# Allegro board Mask_de10_nano.brd
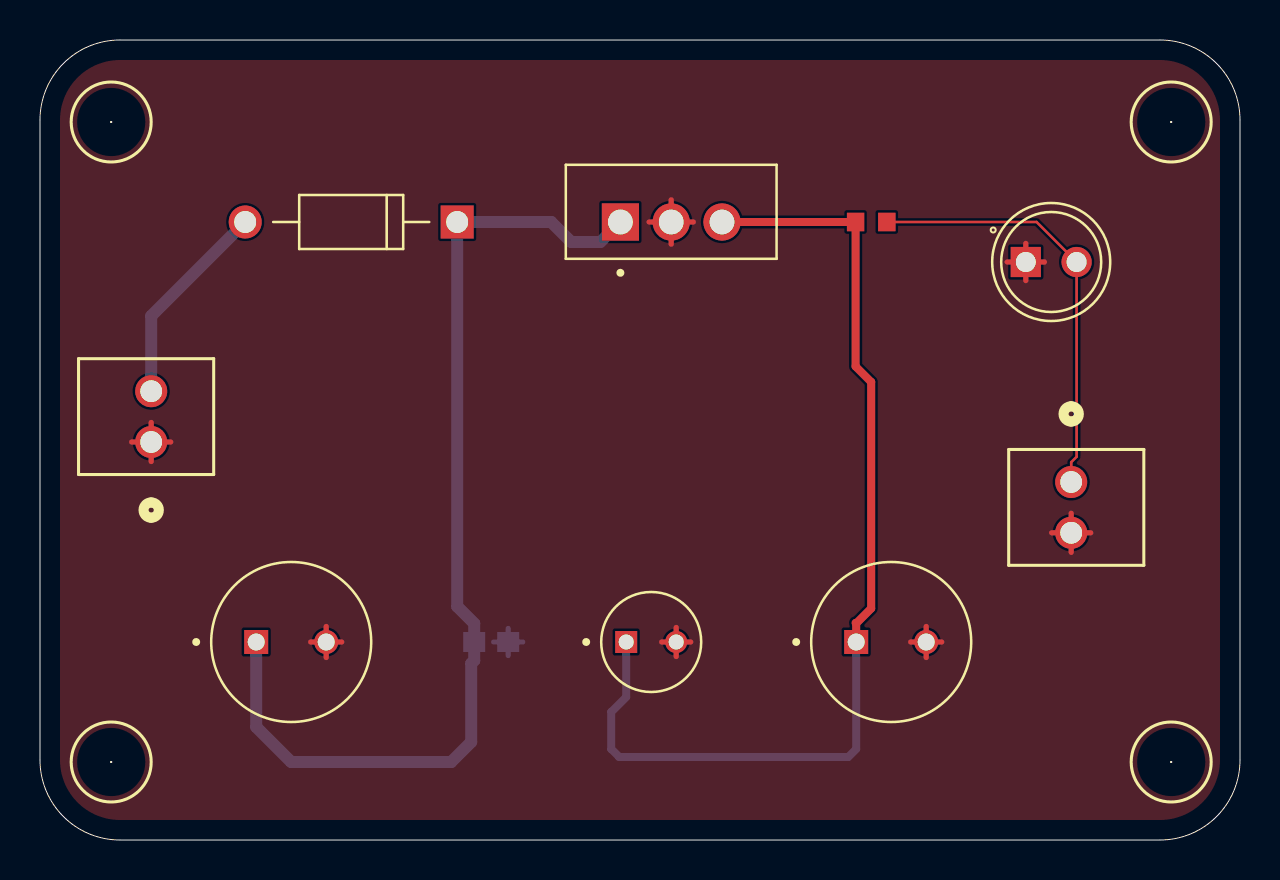
[diagram p0: board, top side]
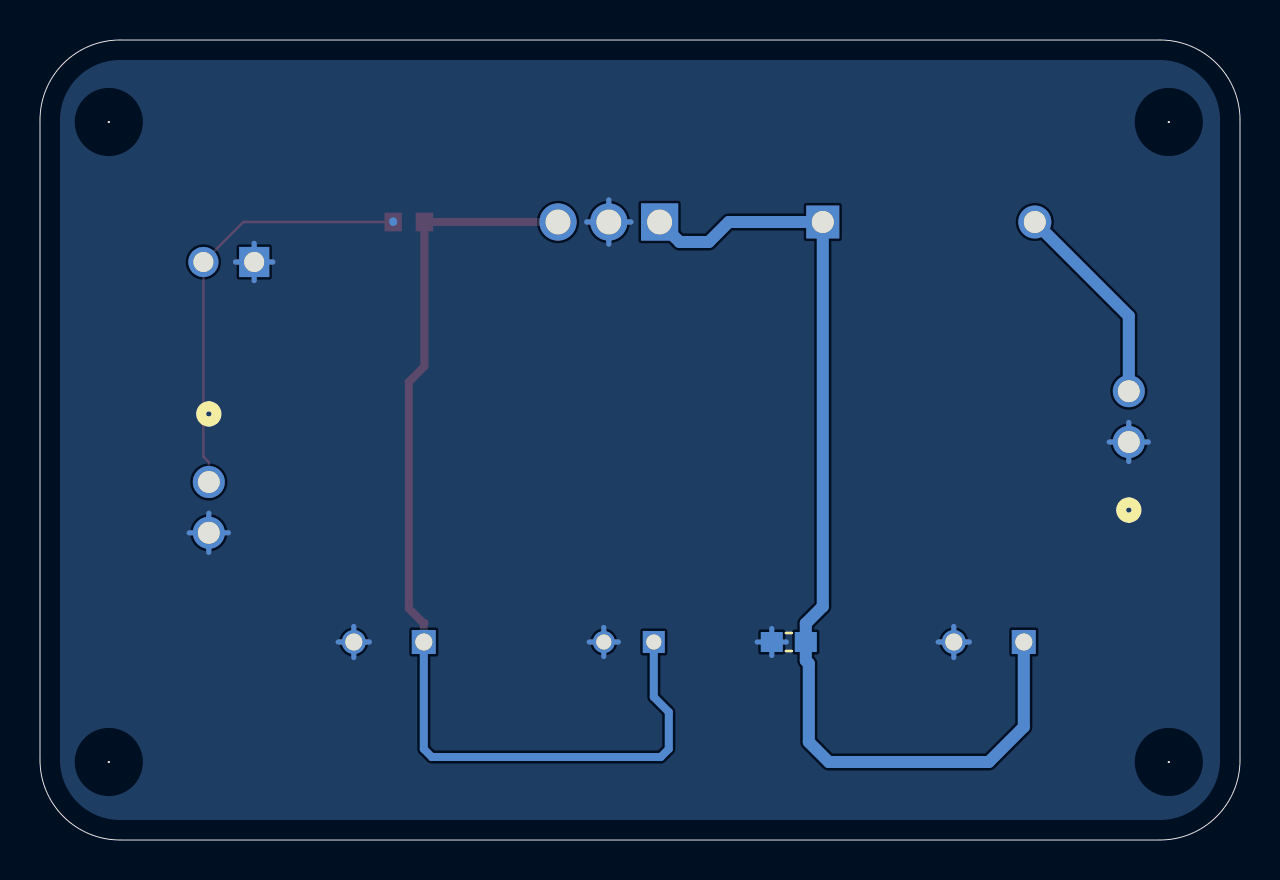
[diagram p1: board, bottom side, seen from below]

Outline 60 x 40 mm; copper layers: TOP, BOTTOM. Coordinates in mm from the lower left corner of the outline.
Outline path: 0,36 arc(1.17,38.83) 4,40 56,40 arc(58.83,38.83) 60,36 60,4 arc(58.83,1.17) 56,0 4,0 arc(1.17,1.17) 0,4 0,36

## Design rules (mm)
constraint set DEFAULT: min track width 0.127
nets with their own width: min track width 0.254; nets GND
nets with their own width: min track width 0.4; nets N00455
nets with their own width: min track width 0.6; nets IN12V VIND

## Placement (name value [footprint] x y rotation side)
C2  1uf  [CAPC1608X90]  22.56 9.9 180 bottom
C3  47uf  [CAPPRD250W50D500H1100]  30.56 9.9 0 top
C4  100uf  [CAPPRD350W60D800H1150]  42.56 9.9 0 top
C5  470 uf  [CAPPRD350W60D800H1150]  12.56 9.9 0 top
D1  1N4007  [DIOAD1060W80L520D270]  15.56 30.9 180 top
D2  led  [LED_WP7113SECJ3]  50.56 28.9 0 top
J1  in12v  [CONN_39773-0002_MOL]  5.56 19.9 90 top
J2  out12v  [CONN_39773-0002_MOL]  51.56 17.9 270 top
NOREF  -  [unnamed]  3.56 3.9 0 top
NOREF#2  -  [unnamed]  56.56 35.9 0 top
NOREF#3  -  [unnamed]  3.56 35.9 0 top
NOREF#4  -  [unnamed]  56.56 3.9 0 top
R1  1k  [RESC1608X55N]  41.56 30.9 0 top
VR2  LM7812CTNOPB  [TO254P1054X470X1955-3]  31.56 30.9 0 top

## Library data of the parts
C2 = TACL105K010XTA
C3 = EEUHD1E470
C4 C5 = EEUFR1V101B
D1 = 1N4007
D2 = WP7113SECJ3
J1 J2 = 397730002_1
R1 = CR0603AFX-1001EAS
VR2 = LM7812CTNOPB

## Footprints (pads in the part's own frame, mm; a bottom-side part is the same pattern mirrored in y, then rotated)
CAPC1608X90
  rect 1.1x1 smd: 1(-0.85,0) 2(0.85,0)
CAPPRD250W50D500H1100
  round 1.1 hole 0.75: N(1.25,0)
  rect 1.1x1.1 hole 0.75: P(-1.25,0)
CAPPRD350W60D800H1150
  round 1.2 hole 0.85: N(1.75,0)
  rect 1.2x1.2 hole 0.85: P(-1.75,0)
CONN_39773-0002_MOL
  round 1.6 hole 1.092: 1(0,0) 2(2.54,0)
DIOAD1060W80L520D270
  round 1.65 hole 1.1: A(5.3,0)
  rect 1.65x1.65 hole 1.1: C(-5.3,0)
LED_WP7113SECJ3
  round 1.508 hole 1: A(1.27,0)
  rect 1.508x1.508 hole 1: C(-1.27,0)
RESC1608X55N
  rect 0.87x0.93 smd: 1(-0.78,0) 2(0.78,0)
TO254P1054X470X1955-3
  rect 1.86x1.86 hole 1.24: 1(-2.54,0)
  round 1.86 hole 1.24: 2(0,0) 3(2.54,0)
unnamed
  round 0.1 hole 3 unplated: (0,0)

## Nets
GND: C2.1 C3.N C4.N C5.N D2.C J1.1 J2.2 VR2.2
VIND: C2.2 C5.P D1.C VR2.1
IN12V: D1.A J1.2
N00455: C3.P C4.P R1.1 VR2.3(OUTPUT)
N00468: D2.A J2.1 R1.2

## Routing (per net, layer and track width the routed paths; a pad name or vN(x,y) marks a point on that pad's centre or on a via; arc(x,y) is an arc through that point)
GND: length 53.1
  TOP w0.254: 14.31,9.12 C5.N ; C5.N 13.53,9.9 ; C5.N 14.31,10.68 ; C5.N 15.09,9.9 ; 48.36,28.9 D2.C ; D2.C 49.29,29.83 ; D2.C 50.22,28.9 ; D2.C 49.29,27.97 ; 4.58,19.9 J1.1 ; J1.1 5.56,18.92 ; J1.1 5.56,20.88 ; J1.1 6.54,19.9 ; 30.45,30.9 VR2.2 ; VR2.2 32.67,30.9 ; VR2.2 31.56,29.79 ; VR2.2 31.56,32.01 ; 43.53,9.9 C4.N ; C4.N 44.31,9.12 ; C4.N 45.09,9.9 ; C4.N 44.31,10.68 ; 50.58,15.36 J2.2 ; J2.2 52.54,15.36 ; J2.2 51.56,16.34 ; J2.2 51.56,14.38 ; C3.N 31.81,10.63 ; C3.N 32.54,9.9 ; C3.N 31.81,9.17 ; C3.N 31.08,9.9
  BOTTOM w0.254: C2.1 23.41,10.58 ; C2.1 23.41,9.22 ; C2.1 22.68,9.9 ; C2.1 24.14,9.9 ; C4.N 44.31,10.68 ; C4.N 44.31,9.12 ; C4.N 43.53,9.9 ; C4.N 45.09,9.9 ; 49.29,27.97 D2.C ; D2.C 48.36,28.9 ; D2.C 50.22,28.9 ; D2.C 49.29,29.83 ; J2.2 51.56,16.34 ; J2.2 52.54,15.36 ; J2.2 51.56,14.38 ; J2.2 50.58,15.36 ; 14.31,9.12 C5.N ; C5.N 13.53,9.9 ; C5.N 15.09,9.9 ; C5.N 14.31,10.68 ; 30.45,30.9 VR2.2 ; VR2.2 31.56,29.79 ; VR2.2 31.56,32.01 ; VR2.2 32.67,30.9 ; 31.81,9.17 C3.N ; C3.N 32.54,9.9 ; C3.N 31.81,10.63 ; C3.N 31.08,9.9 ; J1.1 5.56,20.88 ; J1.1 6.54,19.9 ; J1.1 5.56,18.92 ; J1.1 4.58,19.9
  BOTTOM w0.4: 42.34,30.9 42.34,30.93
VIND: length 51.5
  BOTTOM w0.6: VR2.1 28.02,29.9 26.56,29.9 25.56,30.9 D1.C 20.86,11.68 21.71,10.83 C2.2 21.71,8.97 21.56,8.82 21.56,4.9 20.56,3.9 12.56,3.9 10.81,5.65 C5.P
IN12V: length 10.4
  BOTTOM w0.6: J1.2 5.56,26.2 D1.A
N00455: length 52.3
  TOP w0.4: 40.78,10.86 40.81,10.83 ; 40.81,10.83 41.56,11.58 41.56,22.9 40.78,23.68 R1.1 VR2.3 ; 40.81,10.83 C4.P
  BOTTOM w0.4: C3.P 29.31,7.15 28.56,6.4 28.56,4.55 28.96,4.15 40.41,4.15 40.81,4.55 C4.P 41.16,9.9
N00468: length 21.4
  TOP w0.127: R1.2 49.83,30.9 D2.A 51.83,19.16 51.56,18.89 J2.1

## Copper pours and planes (outline as drawn; the poured copper is in the pictures)
GND on TOP, BOTTOM: 1,36 1.88,38.12 4,39 56,39 58.12,38.12 59,36 59,4 58.12,1.88 56,1 4,1 1.88,1.88 1,4
